# EAGLE board notdavis (EAGLE 6.6.0)
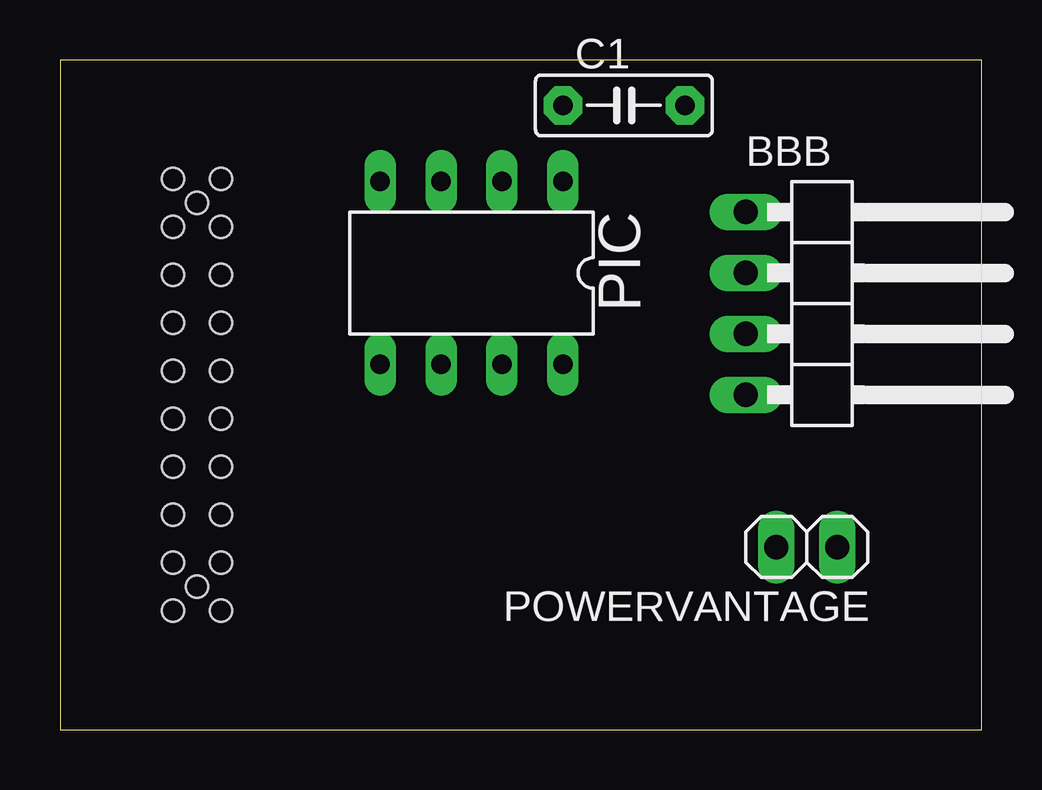
[diagram p0: board, top side]
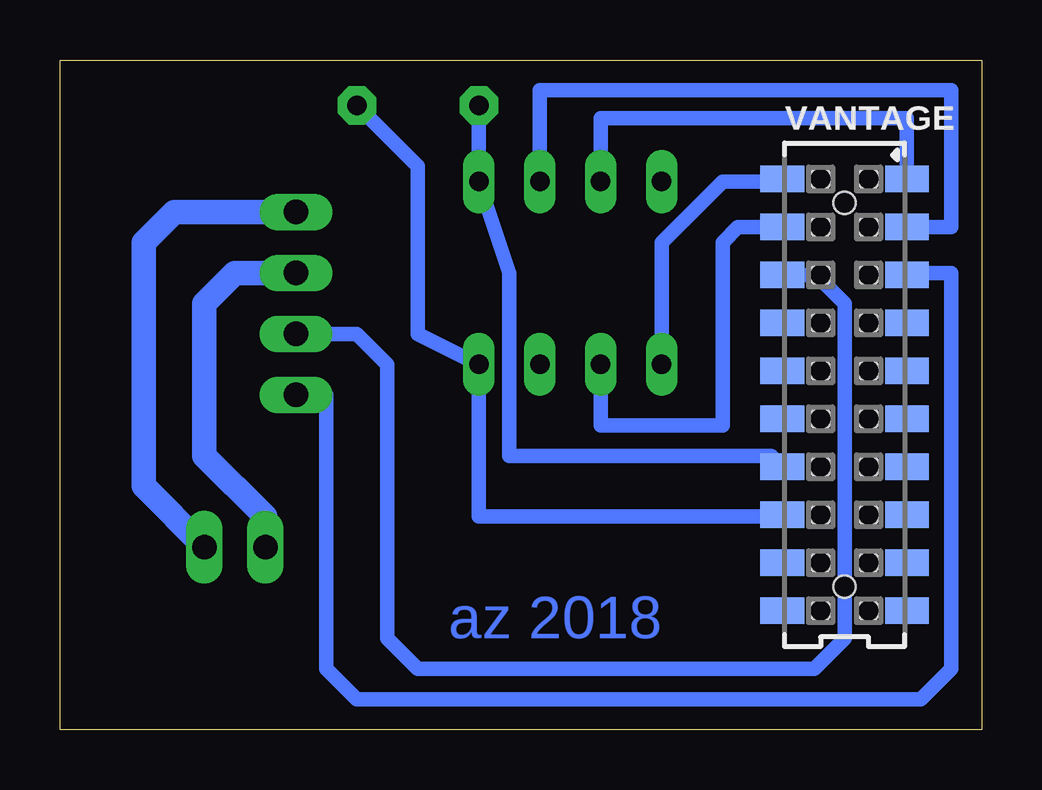
[diagram p1: board, bottom side, seen from below]

Size 38.41 x 27.93 mm. Coordinates in mm from the lower left corner, seen from the top.
Outline: 0,0 38.41,0 38.41,27.93 0,27.93 0,0
Copper layers (1*16): Top 0.035mm / dielectric 1.5mm / Bottom 0.035mm
Design rules "default": minimum track width 10mil, minimum drill 24mil, track to track 8mil, track to pad 8mil, pad to pad 8mil, via to via 8mil, smd to smd 8mil, copper to edge 40mil, drill to drill 8mil, minimum pad ring 10mil, minimum via ring 8mil, stop-mask expansion 4mil, vias tented up to drill 0mil, thermal gap 10mil
Net classes: 0 default: clearance 0.205 mm

## Footprints (pad centres in the part's own frame; a part is rotated, then mirrored left to right if it is on the bottom)
1X04/90 = drill 1.016 long: 1 -3.81,-3.81; 2 -1.27,-3.81; 3 1.27,-3.81; 4 3.81,-3.81
C5B2.5 = drill 0.813 pad 1.6 octagon: 1 -2.54,0; 2 2.54,0
DIL8 = drill 0.813 long: 1 -3.81,-3.81; 2 -1.27,-3.81; 3 1.27,-3.81; 4 3.81,-3.81; 5 3.81,3.81; 6 1.27,3.81; 7 -1.27,3.81; 8 -3.81,3.81
1X02 = drill 1.016 long: 1 -1.27,0; 2 1.27,0
79109-20 = smd 1.12 x 1.83: 1 -9,2.6; 2 -9,-2.6; 3 -7,2.6; 4 -7,-2.6; 5 -5,2.6; 6 -5,-2.6; 7 -3,2.6; 8 -3,-2.6; 9 -1,2.6; 10 -1,-2.6; 11 1,2.6; 12 1,-2.6; 13 3,2.6; 14 3,-2.6; 15 5,2.6; 16 5,-2.6; 17 7,2.6; 18 7,-2.6; 19 9,2.6; 20 9,-2.6 | hole 0.914: -8,0; -9,1; -9,-1; -7,-1; -7,1; -5,-1; -5,1; 8,0; -3,1; -3,-1; -1,1; -1,-1; 1,1; 1,-1; 3,1; 3,-1; 5,-1; 5,1; 7,1; 7,-1; 9,1; 9,-1

## Placement (x,y rotation side)
BBB  [1X04/90]  32.39,17.78 270 top
C1  0.1uf  [C5B2.5]  23.49,26.04 0 top
PIC  16F18313  [DIL8]  17.14,19.05 180 top
POWERVANTAGE  [1X02]  31.11,7.62 180 top
VANTAGE  [79109-20]  5.71,13.97 270 bottom

## Library data of the parts
BBB POWERVANTAGE = pinhead
C1 = capacitor-wima
PIC = microchip; MF: MICROCHIP; MPN: PIC12F683-I/P; OC_FARNELL: 9759034; OC_NEWARK: 89H0442
VANTAGE = con-molex-milli-grid

## Nets
CK: PIC.3 VANTAGE.1
GND: C1.2 PIC.8 VANTAGE.16
MISO: PIC.2 VANTAGE.3
MOSI: PIC.6 VANTAGE.4
N$1: BBB.2 POWERVANTAGE.2
RXD: BBB.3 VANTAGE.6
SS: PIC.5 VANTAGE.2
TXD: BBB.4 VANTAGE.5
VCC3.3: C1.1 PIC.1 VANTAGE.14
VCC5: BBB.1 POWERVANTAGE.1

## Tracks (layer width: path | path; a pad name or v marks a point on that pad's centre or on a via)
CK
  Bottom 0.61: PIC.3 15.88,25.51 3.12,25.51 VANTAGE.1
GND
  Bottom 0.61: C1.2 23.49,23.49 23.49,16.51 PIC.8 20.95,8.89 8.39,8.89 VANTAGE.16
MISO
  Bottom 0.61: PIC.2 18.41,26.67 1.27,26.67 1.27,20.96 3.12,20.96 VANTAGE.3
MOSI
  Bottom 0.61: PIC.6 15.88,12.7 10.79,12.7 10.79,20.32 10.16,20.96 8.31,20.96 VANTAGE.4
N$1
  Bottom 1.016: POWERVANTAGE.2 29.84,8.89 32.39,11.43 32.39,17.78 31.11,19.05 BBB.2
RXD
  Bottom 0.61: BBB.3 26.04,16.51 24.76,15.24 24.76,3.81 23.49,2.54 6.99,2.54 5.71,3.81 5.71,17.78 6.91,18.97 VANTAGE.6
SS
  Bottom 0.61: PIC.5 13.34,20.32 10.79,22.86 8.31,22.86 VANTAGE.2
TXD
  Bottom 0.61: BBB.4 27.3,13.97 27.3,2.54 26.04,1.27 2.54,1.27 1.27,2.54 1.27,19.05 3.12,19.05 VANTAGE.5
VCC3.3
  Bottom 0.61: C1.1 PIC.1 19.68,19.05 19.68,11.43 8.78,11.43 VANTAGE.14
VCC5
  Bottom 1.016: POWERVANTAGE.1 34.93,10.16 34.93,20.32 33.66,21.59 BBB.1
(copper drawn outside any net)
  shapes: Bottom circle x1

## Text on the board
Bottom: az 2018